# Altium PCB PCB.PcbDoc
Units mm, origin at the board's own origin, x right, y up, seen from the top; angles counter-clockwise.
Board outline 92 x 50 mm, 2 copper layers (Top Layer, Bottom Layer); 42 components, 29 nets, 113 pads, 16 vias.
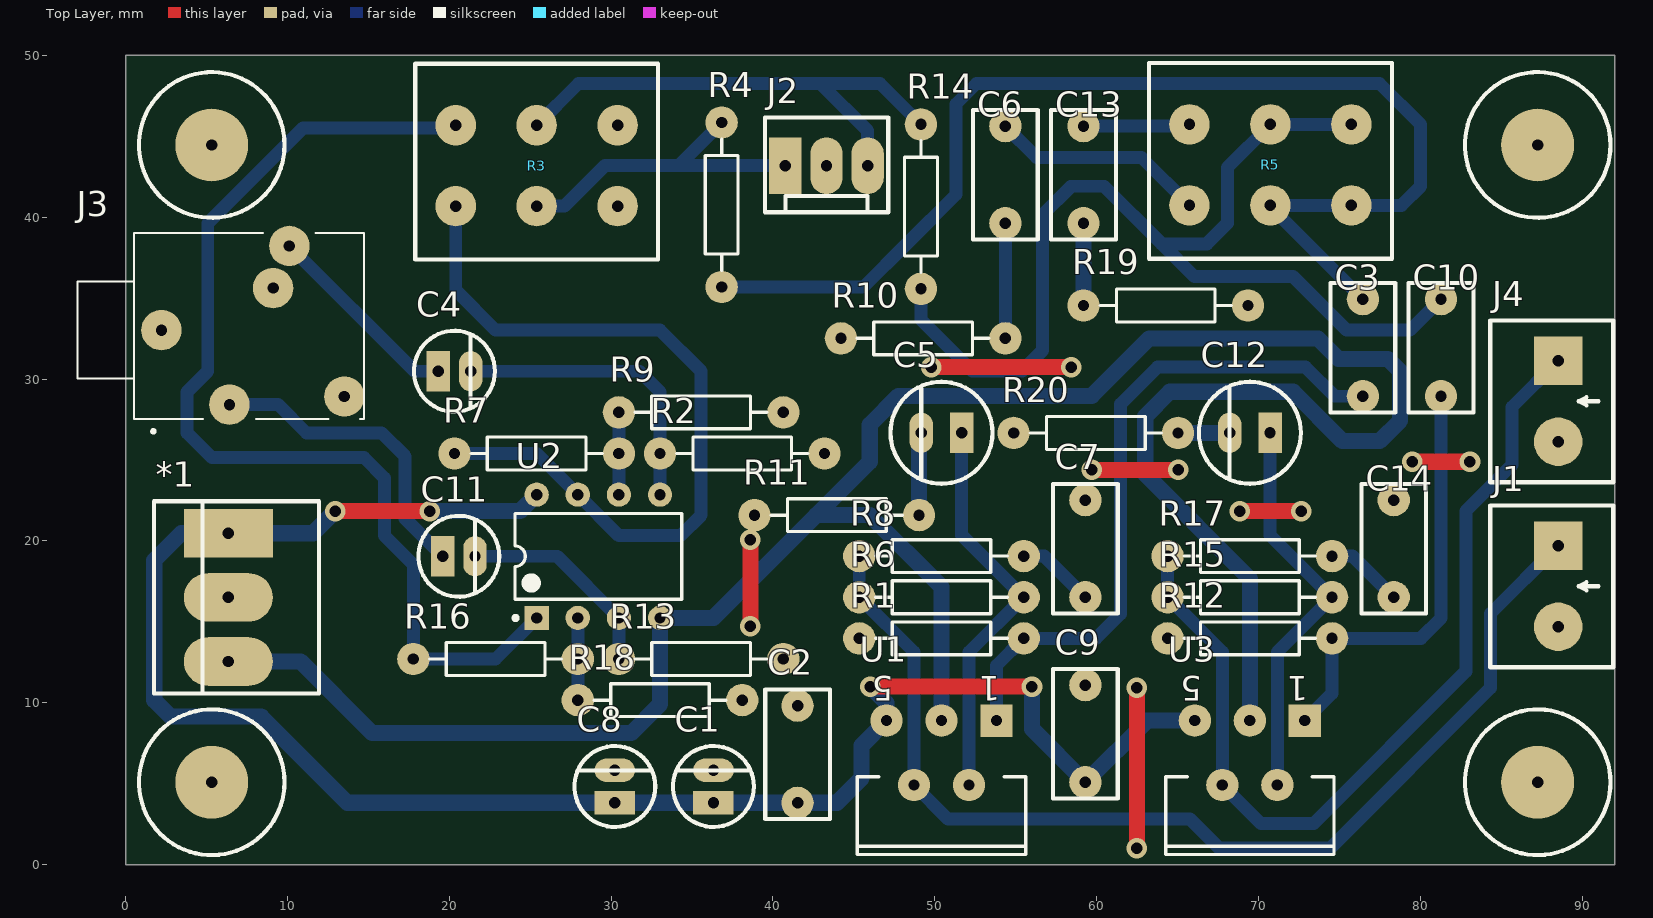
[diagram p0: Top Layer view]
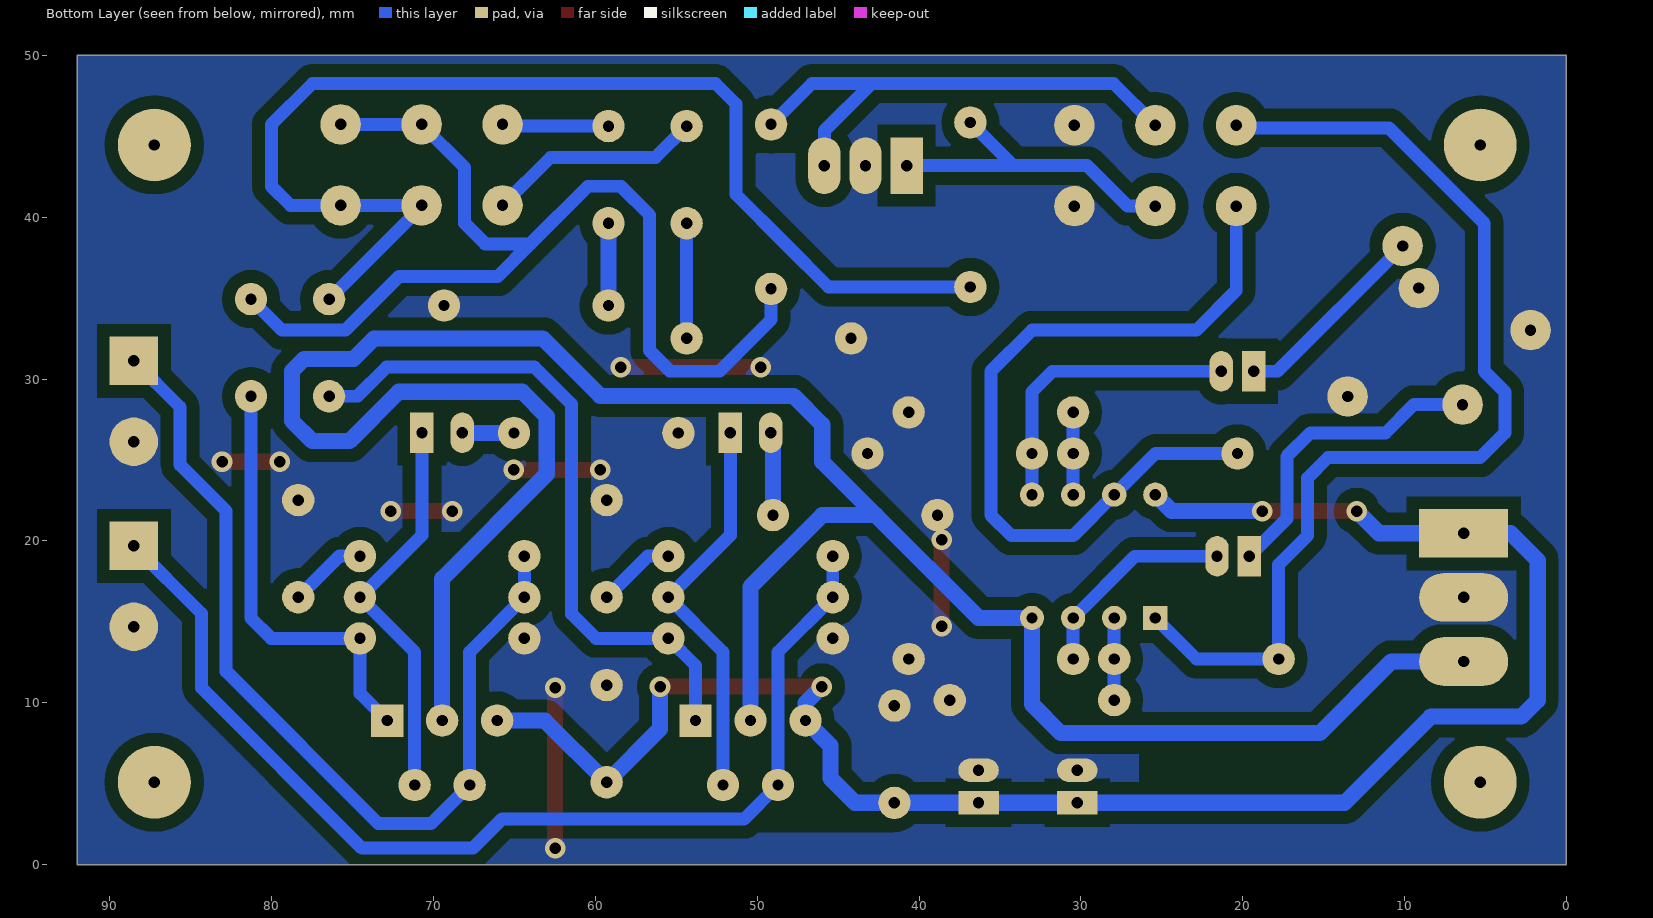
[diagram p1: Bottom Layer view, seen from below]

## Layer stack, top to bottom
Top Solder: solder mask 0.0102, Solder Resist, Dk 3.5
Top Layer: signal copper 0.0356
Dielectric 1: dielectric 0.32, FR-4, Dk 4.8
Bottom Layer: signal copper 0.0356
Bottom Solder: solder mask 0.0102, Solder Resist, Dk 3.5

## Board outline
0,0 92,0 92,50 0,50

## Design rules (kind name [scope] priority, off if disabled: settings)
Clearance Polygon [InPolygon] p1: gap=0.8 ignorepadtopadclearanceinfootprint=TRUE
Clearance [All] p2: gap=0.254 ignorepadtopadclearanceinfootprint=FALSE except(0: Arc-Hole Track-Hole SMDPad-Hole THPad-Hole Via-Hole Fill-Hole Poly-Hole Region-Hole Text-Hole)
PolygonConnect [All] p1: connectstyle=Direct reliefconductorwidth=0.254 reliefentries=4 polygonreliefangle="90 Angle" airgapwidth=0.254
RoutingVias [All] p1: holewidth=0.711 width=1.27 viastyle="Through Hole" minholewidth=0.711 minwidth=1.27 maxholewidth=0.711 maxwidth=1.27
SolderMaskExpansion [All] p1: expansion=0.102 istentingtop=FALSE
Width [All] p1: maxlimit=1 minlimit=0.75 preferedwidth=0.8
30 further rules are at their usual default settings.

## Components (designator, comment, footprint, x,y, rotation, side; value= is the part's Value field where it differs from the comment)
*1 "Molex KK396 3P" "Molex kk396 3P" 6.35,16.51 r90 top
C1 "100uF 25V" "100uF 25V" 36.322,4.826 r90 top value=100pF
C2 "100nF" 104 41.519,9.819 r270 top value=100pF
C3 "100nF" 104 76.444,28.934 r90 top value=100pF
C4 "4.7uF 50V" "4.7uF 50V" 20.32,30.48 r0 top value=100pF
C5 "22uF 63V" "22uF 63V" 50.409,26.679 r180 top value=100pF
C6 "22nF" 104 54.356,39.624 r90 top value=100pF
C7 "100nF" 104 59.299,16.519 r90 top value=100pF
C8 "100uF 25V" "100uF 25V" 30.226,4.826 r90 top value=100pF
C9 "100nF" 104 59.299,5.089 r90 top value=100pF
C10 "100nF" 104 81.27,28.934 r90 top value=100pF
C11 "4.7uF 50V" "4.7uF 50V" 20.59,19.05 r0 top value=100pF
C12 "22uF 63V" "22uF 63V" 69.459,26.679 r180 top value=100pF
C13 "22nF" 104 59.182,39.624 r90 top value=100pF
C14 "100nF" 104 78.349,16.519 r90 top value=100pF
J1 "TERMINAL 2P" "TERMINAL 2P" 88.509,19.694 r90 top
J2 "Molex 3" "Molex kk100 3P" 43.307,43.18 r180 top
J3 "PJ324M" WENZHOU_PJ324M 7.62,33.02 r90 top
J4 "TERMINAL 2P" "TERMINAL 2P" 88.509,31.124 r90 top
R1 "22K" AXIAL-0.4 50.409,13.979 r0 top value=1K
R2 "10K" AXIAL-0.4 38.1,25.4 r0 top value=1K
R3 "Pot stereo" "Pote doble" 25.4,43.18 r180 top value=50K
R4 "100K" AXIAL-0.4 36.83,40.767 r90 top value=1K
R5 "Pot stereo" "Pote doble" 70.729,43.229 r180 top value=50K
R6 "22K" AXIAL-0.4 50.409,16.519 r0 top value=1K
R7 "100K" AXIAL-0.4 25.4,25.4 r0 top value=1K
R8 "1" AXIAL-0.4 50.409,19.059 r0 top value=1K
R9 "47K" AXIAL-0.4 35.56,27.94 r0 top value=1K
R10 "1K" AXIAL-0.4 49.276,32.512 r180 top
R11 "680" AXIAL-0.4 43.942,21.59 r0 top value=1K
R12 "22K" AXIAL-0.4 69.459,13.979 r0 top value=1K
R13 "10K" AXIAL-0.4 35.56,12.7 r0 top value=1K
R14 "100K" AXIAL-0.4 49.139,40.649 r90 top value=1K
R15 "22K" AXIAL-0.4 69.459,16.519 r0 top value=1K
R16 "100K" AXIAL-0.4 22.86,12.7 r0 top value=1K
R17 "1" AXIAL-0.4 69.459,19.059 r0 top value=1K
R18 "47K" AXIAL-0.4 33.02,10.16 r0 top value=1K
R19 "1K" "AXIAL-0.4 MIA" 64.262,34.544 r0 top
R20 "680" AXIAL-0.4 59.944,26.67 r0 top value=1K
U1 "TDA2030" TDA2030 50.409,6.909 r180 top
U2 "NE5532AJG" DIP-8 29.21,19.05 r90 top
U3 "TDA2030" TDA2030 69.459,6.909 r180 top

## Footprints (in the part's own frame and the unit in brackets; to place one, negate y for a bottom-side part, rotate by r counter-clockwise, add the part's x,y. Pads: shape width x height; smd on the part's side, far side on the other; paste and mask are expansions set on the pad)
"4.7uF 50V" [mm]
  rect 1.45x2.5 hole 0.7: 1(-1,0)
  oval 1.45x2.5 hole 0.7: 2(1,0)
  silkscreen extent -2.5,-2.5 2.5,2.5, body extent -2.5,-2.5 2.5,2.5, height 1.27
"22uF 63V" [mm]
  rect 1.45x2.5 hole 0.7: 1(-1.25,0)
  oval 1.45x2.5 hole 0.7: 2(1.25,0)
  silkscreen extent -3.15,-3.15 3.15,3.15, body extent -3.15,-3.15 3.15,3.15, height 1.27
"100uF 25V" [mm]
  rect 1.45x2.5 hole 0.7: 1(-1,0)
  oval 1.45x2.5 hole 0.7: 2(1,0)
  silkscreen extent -2.5,-2.5 2.5,2.5, body extent -2.5,-2.5 2.5,2.5, height 1.27
104 [mm]
  round 2 hole 0.7: 1(0,0) 2(6,0)
  silkscreen extent -1,-2 7,2
AXIAL-0.4 [mm] "Axial Device, Thru-Hole; 2 Leads; 0.4 in Pin Spacing"
  round 2 hole 0.7: 1(-5.08,0) 2(5.08,0)
  silkscreen extent -4.06,-1.02 4.06,1.02
"AXIAL-0.4 MIA" [mm] "Axial Device, Thru-Hole; 2 Leads; 0.4 in Pin Spacing"
  round 2 hole 0.7: 1(-5.08,0) 2(5.08,0)
  silkscreen extent -4.06,-1.02 4.06,1.02, body extent -5.33,-1.15 5.33,1.14, height 2.63
DIP-8 [mm] "DIP; 8 Leads; Row Spacing 7.62 mm; Pitch 2.54 mm"
  rect 1.5x1.5 hole 0.7: 1(-3.81,3.81)
  round 1.5 hole 0.7: 2(-3.81,1.27) 3(-3.81,-1.27) 4(-3.81,-3.81) 5(3.81,-3.81) 6(3.81,-1.27) 7(3.81,1.27) 8(3.81,3.81)
  silkscreen extent -3.93,-5.15 2.65,5.23, body extent -3.6,-5.15 3.6,5.15, height 5.08
"Molex kk100 3P" [mm]
  rect 2x3.5 hole 0.7: 1(2.54,0)
  oval 2x3.5 hole 0.7: 2(0,0) 3(-2.54,0)
  silkscreen extent -3.81,-2.98 3.81,2.88
"Molex kk396 3P" [mm]
  rect 3x5.5 hole 0.7: 1(3.96,0)
  oval 3x5.5 hole 0.7: 2(0,0) 3(-3.96,0)
  silkscreen extent -5.94,-5.6 5.94,4.6
"Pote doble" [mm]
  round 2.5 hole 0.7: 1(5,2.5) 2(0,2.5) 3(-5,2.5) 4(5,-2.5) 5(0,-2.5) 6(-5,-2.5)
  silkscreen extent -7.5,-6.3 7.5,5.8, body extent -8.9,-21.25 8.2,5.85, height 3.5
TDA2030 [mm]
  rect 2x2 hole 0.7: 1(-3.4,-1.99)
  round 2 hole 0.7: 2(-1.7,1.99) 3(0,-1.99) 4(1.7,1.99) 5(3.4,-1.99)
  silkscreen extent -5.2,1.48 5.2,6.28
"TERMINAL 2P" [mm]
  rect 3x3 hole 0.7: 1(0,0)
  round 3 hole 0.7: 2(-5,0)
  silkscreen extent -7.5,-3.4 2.5,4.2
WENZHOU_PJ324M [mm]
  round 2.5 hole 0.7: 1(0,5.4) 2(5.2,-2.5) 3(2.6,-1.5) 4(-4.1,-5.9) 5(-4.6,1.2)
  silkscreen extent -6.35,-7.1 6,10.6, body extent -5.75,-7.1 5.75,10.6, height 6.3

## Part data
C1 C4 C5 C8 C11 C12: "Polarized Capacitor (Radial)", LatestRevisionDate=17-Jul-2002, LatestRevisionNote="Re-released for DXP Platform.", PackageDescription="Polarized Capacitor (Radial); 2 Leads", PackageReference=RB7.6-15, Published=8-Jun-2000, Publisher="Altium Limited"
C2 C3 C7 C9 C10 C14: library part 104, "Capacitor", LatestRevisionDate=17-Jul-2002, LatestRevisionNote="Re-released for DXP Platform.", PackageDescription="Radial Cap, Thru-Hole; 2 Leads; 0.3 in Pin Spacing", PackageReference=RAD-0.3, Published=8-Jun-2000, Publisher="Altium Limited"
C6 C13: library part 223, "Capacitor", LatestRevisionDate=17-Jul-2002, LatestRevisionNote="Re-released for DXP Platform.", PackageDescription="Radial Cap, Thru-Hole; 2 Leads; 0.3 in Pin Spacing", PackageReference=RAD-0.3, Published=8-Jun-2000, Publisher="Altium Limited"
J1 J4: "Header, 2-Pin", LatestRevisionDate=17-Jul-2002, LatestRevisionNote="Re-released for DXP Platform.", Publisher="Altium Limited"
J2: library part "Molex kk100 3P", "Header, 3-Pin", LatestRevisionDate=17-Jul-2002, LatestRevisionNote="Re-released for DXP Platform.", Publisher="Altium Limited"
J3: "Headphone Stereo jack/Audio connector", Package=Package, Check_prices=https://www.snapeda.com/parts/PJ324M/Wenzhou+QingPu+Electronics+Co.Ltd/view-part/?ref=eda, MF="Wenzhou QingPu Electronics Co.Ltd", MP=PJ324M, SnapEDA_Link=https://www.snapeda.com/parts/PJ324M/Wenzhou+QingPu+Electronics+Co.Ltd/view-part/?ref=snap
R1 R2 R4 R6 R7 R8 R9 R10 R11 R12 R13 R14 R15 R16 R17 R18 R19 R20: library part Res1, "Resistor", LatestRevisionDate=17-Jul-2002, LatestRevisionNote="Re-released for DXP Platform.", PackageDescription="Axial Device, Thru-Hole; 2 Leads; 0.3 in Pin Spacing", PackageReference=AXIAL-0.3, Published=8-Jun-2000, Publisher="Altium Limited"
R3 R5: library part RPot, "Potentiometer", LatestRevisionDate=17-Jul-2002, LatestRevisionNote="Re-released for DXP Platform.", PackageDescription="Variable Resistor, Thru-Hole; 3 Leads", PackageReference=VR5, Published=8-Jun-2000, Publisher="Altium Limited", Set Position=0.5, Sim Note="Enter the Resistance value and the set point into parameter fields."
U2: "Dual Low-Noise Operational Amplifier", ComponentLink1Description="Manufacturer Link", ComponentLink1URL=http://www.ti.com/, ComponentLink2Description=Datasheet, ComponentLink2URL=http://www-s.ti.com/sc/ds/ne5532a.pdf, DatasheetVersion=May-1988, LatestRevisionDate=04-Mar-2005, LatestRevisionNote="Stylized 3D Model Added.", PackageDescription="DIP; 8 Leads; Row Spacing 7.62 mm; Pitch 2.54 mm", PackageReference=JG008, PackageVersion=Jan-1995, Published=15-Apr-2002, Publisher="Altium Limited"

## Free pads (board coordinates)
  round 4.5 hole 0.7: 1(5.324,5.089) 1(5.324,44.459) 1(87.239,5.089) 1(87.239,44.459)

## Via types
v1: diameter 1.27, hole 0.711, Top Layer to Bottom Layer, 16 vias

## Nets (pads, with @x,y where several pads share a name; then routed paths per layer and width w, separated by ;. In a path a pad name is that pad's centre, name@x,y a point inside that pad or via, vN(x,y) a via of type N, cw(c..) or ccw(c..) an arc to the next point about the centre after c; other vN are vias at no path point)
+12: *1.1 C1.1 C2.2 C8.1 C9.1 U1.5 U2.8 U3.5 | length 113.2
  Top Layer w1: v1(12.954,21.844) v1(18.796,21.844) ; v1(46,11) v1(56,11)
  Bottom Layer w1: v1(12.954,21.844) 11.58,20.47 *1.1 3.452,20.47 1.778,18.796 1.778,10.16 2.794,9.144 8.382,9.144 13.707,3.819 C2.2 43.951,3.819 45.466,5.334 45.466,7.356 U1.5 47.009,9.991 v1(46,11) ; v1(18.796,21.844) 24.384,21.844 U2.8 ; v1(56,11) 56,8.389 C9.1 63.109,8.899 U3.5
-12: *1.3 U1.3 U2.4 U3.3 | length 150.1
  Bottom Layer w1: *1.3 10.818,12.55 15.24,8.128 31.242,8.128 33.02,9.906 U2.4 36.322,15.24 42.672,21.59 ; U1.3 50.409,17.155 45.974,21.59 42.672,21.59 ; U3.3 69.459,17.663 62.992,24.13 62.992,27.686 64.516,29.21 72.136,29.21 75.184,26.162 77.47,26.162 78.74,27.432 78.74,30.48 77.978,31.242 74.93,31.242 73.66,32.512 63.246,32.512 59.69,28.956 47.752,28.956 45.974,27.178 45.974,24.892 42.672,21.59
GND: *1.2 C1.2 C2.1 C7.2 C8.2 C9.2 C14.2 J1.2 J2.2 J3.1 J3.3 J3.4 J4.2 R1.1 R2.2 R3.3 R3.6 R9.2 R10.2 R11.1 R12.1 R13.2 R18.2 R19.2 R20.1 | length 36.6
  Top Layer w1: v1(38.608,14.732) v1(38.608,20.066) ; v1(49.784,30.734) v1(58.42,30.734) ; v1(59.69,24.384) v1(65.024,24.384) ; v1(62.484,1.016) v1(62.484,10.922) ; v1(68.834,21.844) v1(72.644,21.844) ; v1(79.502,24.892) v1(83.058,24.892)
NetC3_1: C3.1 R1.2 U1.1 | length 42
  Bottom Layer w0.8: U1.1 53.809,12.299 R1.2 59.953,13.979 61.468,15.494 61.468,28.448 63.754,30.734 72.898,30.734 74.698,28.934 C3.1
NetC3_2: C3.2 R4.1 R5.2 R5.3 | length 74.5
  Bottom Layer w0.8: R4.1 45.593,35.687 48.26,38.354 51.308,41.402 51.308,46.99 52.578,48.26 77.47,48.26 80.01,45.72 80.01,41.91 78.829,40.729 R5.3 R5.2 70.729,40.649 C3.2
NetC4_1: C4.1 J3.2 | length 12.4
  Bottom Layer w0.8: J3.2 17.86,30.48 C4.1
NetC4_2: C4.2 R2.1 U2.5 | length 18.6
  Bottom Layer w0.8: C4.2 31.75,30.48 33.02,29.21 R2.1 U2.5
NetC5_1: C5.1 R6.2 U1.2 | length 24.7
  Bottom Layer w0.8: C5.1 51.659,20.349 R6.2 52.109,13.139 U1.2
NetC5_2: C5.2 R11.2 | length 4.9
  Bottom Layer w1: R11.2@49.022,21.844 49.022,26.542 C5.2
NetC6_1: C6.1 R10.1 | length 7.1
  Bottom Layer w0.8: R10.1 C6.1
NetC6_2: C6.2 R5.1 | length 13.6
  Bottom Layer w0.8: C6.2@54.219,45.729 C6.2@54.34,45.608 ; C6.2 56.292,43.688 62.771,43.688 R5.1
NetC7_1: C7.1 R8.2 | length 4.9
  Bottom Layer w0.8: R8.2 56.759,19.059 C7.1
NetC10_1: C10.1 R12.2 U3.1 | length 26.7
  Bottom Layer w0.8: U3.1 74.539,10.579 R12.2 80.019,13.979 81.27,15.23 C10.1
NetC10_2: C10.2 R5.5 R5.6 R14.1 | length 66.3
  Bottom Layer w0.8: R14.1 49.139,33.665 52.324,30.48 55.372,30.48 56.642,31.75 56.642,40.132 58.42,41.91 60.452,41.91 64.008,38.354 ; R5.6 R5.5 68.072,43.072 68.072,39.624 66.802,38.354 64.008,38.354 ; C10.2 79.356,33.02 75.438,33.02 72.136,36.322 66.04,36.322 64.008,38.354
NetC11_1: C11.1 J3.5 | length 19.3
  Bottom Layer w0.8: J3.5 9.426,28.42 11.176,26.67 15.827,26.67 17.272,25.225 17.272,21.368 C11.1
NetC11_2: C11.2 R13.1 U2.3 | length 13
  Bottom Layer w0.8: C11.2 26.67,19.05 U2.3 R13.1
NetC12_1: C12.1 R15.2 U3.2 | length 24.7
  Bottom Layer w0.8: C12.1 70.709,20.349 R15.2 71.159,13.139 U3.2
NetC12_2: C12.2 R20.2 | length 3.2
  Bottom Layer w1: R20.2 68.2,26.67 C12.2
NetC13_1: C13.1 R19.1 | length 5.1
  Bottom Layer w1: R19.1 C13.1
NetC13_2: C13.2 R5.4 | length 6.6
  Bottom Layer w0.8: C13.2 65.427,45.624 65.532,45.729 R5.4
NetC14_1: C14.1 R17.2 | length 4.9
  Bottom Layer w0.8: R17.2 75.809,19.059 C14.1
NetJ1_1: J1.1 R6.1 R8.1 U1.4 | length 67.4
  Bottom Layer w0.8: R8.1 R6.1 48.709,13.139 U1.4 50.817,2.811 65.769,2.811 67.564,1.016 74.422,1.016 84.328,10.922 84.328,15.513 J1.1
NetJ2_1: J2.1 R3.2 R4.2 | length 20.2
  Bottom Layer w0.8: R3.2 27.112,40.68 29.612,43.18 34.163,43.18 ; R4.2 34.163,43.18 ; J2.1 34.163,43.18
NetJ2_3: J2.3 R3.5 R14.2 | length 32.1
  Bottom Layer w0.8: R3.5 27.98,48.26 42.926,48.26 ; J2.3 45.847,45.339 42.926,48.26 ; R14.2 46.609,48.26 42.926,48.26
NetJ4_1: J4.1 R15.1 R17.1 U3.4 | length 57
  Bottom Layer w0.8: R17.1 R15.1 67.759,13.139 U3.4 70.139,2.54 73.406,2.54 82.804,11.938 82.804,21.844 85.657,24.697 85.657,28.272 J4.1
NetR3_1: R3.1 R7.1 U2.7 | length 49.2
  Bottom Layer w0.8: R7.1 25.4,25.4 U2.7 30.48,20.32 34.29,20.32 35.56,21.59 35.56,30.48 33.02,33.02 22.86,33.02 20.4,35.48 R3.1
NetR3_4: R3.4 R16.1 U2.1 | length 64.8
  Bottom Layer w0.8: R3.4@20,45.52 10.976,45.52 5.08,39.624 5.08,30.48 3.81,29.21 3.81,26.67 5.334,25.146 14.732,25.146 16.002,23.876 16.002,20.32 17.78,18.542 R16.1 22.86,12.7 U2.1
NetR7_2: R7.2 R9.1 U2.6 | length 5.1
  Bottom Layer w0.8: U2.6 R7.2 R9.1
NetR16_2: R16.2 R18.1 U2.2 | length 5.1
  Bottom Layer w0.8: R18.1 R16.2 U2.2

## Polygon pours and split planes (outlines as drawn)
GND on Bottom Layer "GND_L02_P000" (solid, remove dead copper, pour order 0): 0,50 0,0 92,0 92,50

## Other copper
Bottom Layer:
  pour cut-out: 7.366,11.684 10.668,11.684 14.732,7.366 26.416,7.366 26.416,4.572 13.97,4.572
  pour cut-out: 45.466,46.99 46.482,45.72 47.244,43.942 50.038,43.942 50.038,45.72 46.228,47.498
  pour cut-out: 68.326,20.574 68.326,14.224 72.898,14.224 72.898,17.526 69.85,20.574
  pour cut-out: 41.519,2.011 41.519,4.572 45.466,4.572 45.466,7.366 49.961,7.366 49.961,1.955

## Silkscreen, mask and mechanical layers (free items; w line width, h text height)
Top Overlay:
  circle w0.254: c87.239,44.459 r4.5
  circle w0.254: c87.239,5.089 r4.5
  circle w0.254: c5.324,5.089 r4.5
  circle w0.254: c5.324,44.459 r4.5

## Text inside footprints (layer, text, board x,y; h text height)
U1: Top Overlay "1" at 54.029,11.624 h1.5 r180; Top Overlay "5" at 47.429,11.624 h1.5 r180
U3: Top Overlay "1" at 73.079,11.624 h1.5 r180; Top Overlay "5" at 66.479,11.624 h1.5 r180